# Allegro board pcbsonde.brd
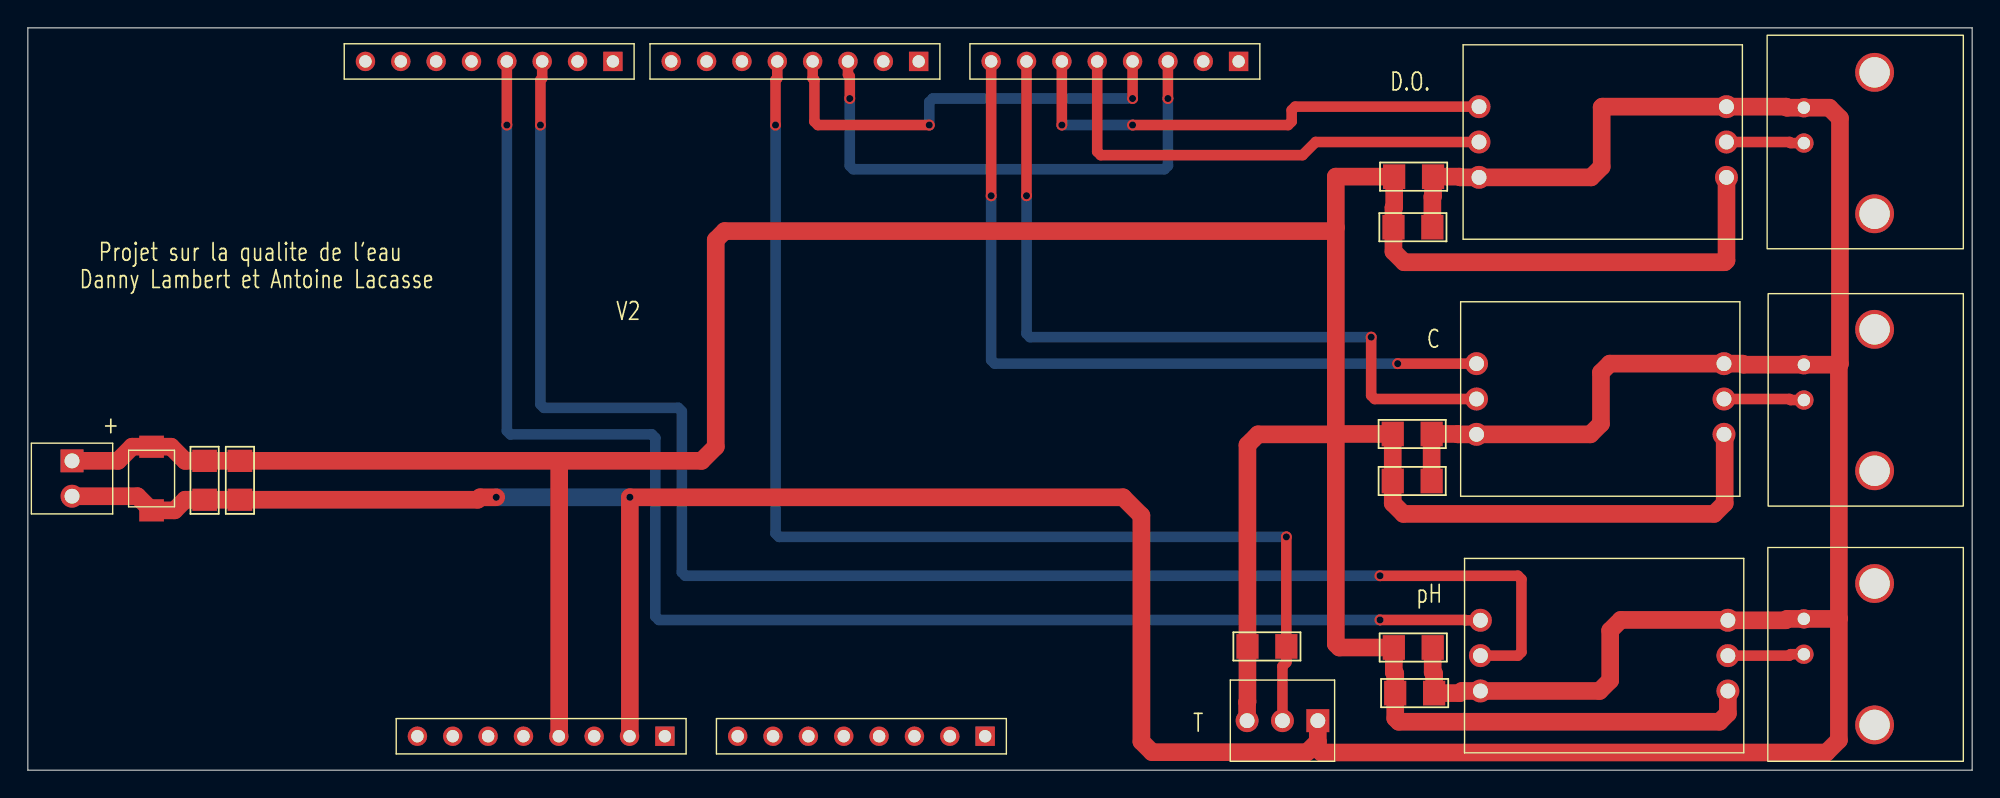
[diagram p0: board, top side]
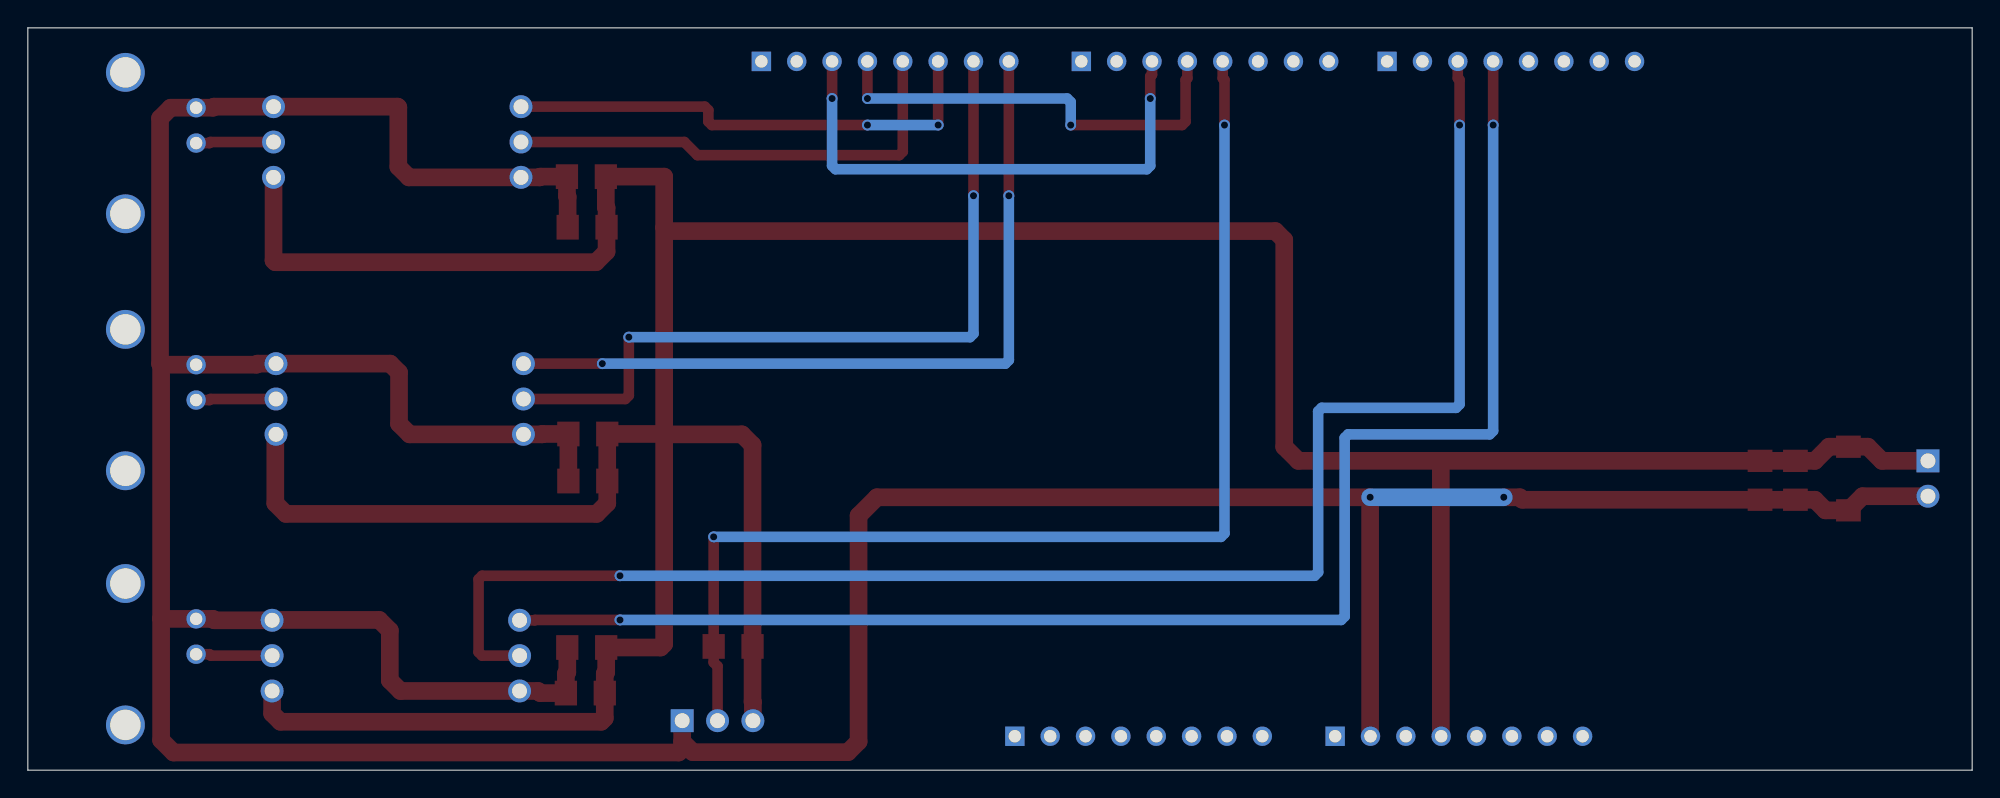
[diagram p1: board, bottom side, seen from below]

Outline 139.7 x 53.34 mm; copper layers: TOP, BOTTOM. Coordinates in mm from the lower left corner of the outline.

## Design rules (mm)
nets with their own width: min track width 0.254; nets N45692 N45704 N45776 N45784 N45788 N45808 N45820 N45850 N45858 N46174 N46194 N46206
nets with their own width: min track width 0.762; nets N45376 N45396

## Placement (name value [footprint] x y rotation side)
C7  100u  [C_1206]  12.7 22.23 270 top
C8  100u  [C_1206]  15.24 22.23 270 top
C101  100u  [C_1206]  98.07 24.16 0 top
C201  0.1u  [C_1206]  98.07 20.78 0 top
C302  100u  [C_1206]  98.17 42.65 0 top
C402  0.1u  [C_1206]  98.12 39.01 0 top
C503  100u  [C_1206]  98.15 8.81 0 top
C603  0.1u  [C_1206]  98.25 5.54 0 top
D1  1N5338  [ZENER_5V]  8.89 20.96 90 top
J1  H8  [STACKER_8]  78.1 50.93 270 top
J2  H8  [STACKER_8]  55.12 50.93 270 top
J3  H8  [STACKER_8]  33.15 50.93 270 top
J4  H8  [STACKER_8]  59.89 2.44 270 top
J5  H8  [STACKER_8]  36.88 2.44 270 top
JP1  Sonde T  [CONNECTEUR_3]  90.14 3.56 270 top
JP2  Alim.  [CONNECTEUR_2]  3.18 20.96 0 top
NOREF  -  []  0 0 0 top
R1  4.7K  [R_1206]  87.63 8.89 0 top
U1  Oxygene  [CONDITIONNEMENT]  113.16 45.14 0 top
U2  Conductivite  [CONDITIONNEMENT]  112.98 26.67 0 top
U3  pH  [CONDITIONNEMENT]  113.26 8.23 0 top
U4  Sonde pH  [BNC_CONNECTEUR]  125.07 15.95 270 top
U5  Sonde O  [BNC_CONNECTEUR]  125.07 52.68 270 top
U6  Sonde C  [BNC_CONNECTEUR]  125.07 34.21 270 top

## Library data of the parts
C7 C8 C101 C201 C302 C402 C503 C603 = C
D1 = 1N4099
J1 J2 J4 J5 = HEADER 10_0
J3 = HEADER 10_2
JP1 = HEADER 10_5
JP2 = HEADER 10_4
R1 = R
U1 = Oxygene
U2 = Conductivite
U3 = pH
U4 = Probe_3
U5 = Probe_2
U6 = Probe_1

## Footprints (pads in the part's own frame, mm; a bottom-side part is the same pattern mirrored in y, then rotated)
BNC_CONNECTEUR
  round 1.397 hole 0.889: 1(5.08,2.54) 2(7.62,2.54)
  round 2.794 hole 2.184: 3(2.54,7.62) 4(12.7,7.62)
C_1206
  rect 1.6x1.778 smd: 1(0,0) 2(2.794,0)
CONDITIONNEMENT
  round 1.651 hole 1.067: 1(-8.89,2.54) 2(-8.89,0) 3(-8.89,-2.54) 4(8.89,-2.54) 5(8.89,0) 6(8.89,2.54)
CONNECTEUR_2
  rect 1.651x1.651 hole 1.067: 1(0,1.27)
  round 1.651 hole 1.067: 2(0,-1.27)
CONNECTEUR_3
  rect 1.651x1.651 hole 1.067: 1(0,2.54)
  round 1.651 hole 1.067: 2(0,0) 3(0,-2.54)
R_1206
  rect 1.6x1.778 smd: 1(0,0) 2(2.794,0)
STACKER_8
  rect 1.397x1.397 hole 0.889: 1(0,8.89)
  round 1.397 hole 0.889: 2(0,6.35) 3(0,3.81) 4(0,1.27) 5(0,-1.27) 6(0,-3.81) 7(0,-6.35) 8(0,-8.89)
ZENER_5V
  rect 1.6x1.778 smd: 1(-2.286,0) 2(2.286,0)

## Nets
N45376: C7.2 C8.2 C101.2 C201.2 C302.2 C402.2 C503.2 C603.2 D1.1(A) J5.2 JP1.1 JP2.2(-) U1.3(GND#3) U1.6(GND#6) U2.3(GND#3) U2.6(GND#6) U3.3(GND#3) U3.6(GND#6) U4.1(GND) U5.1(GND) U6.1(GND)
N45396: C7.1 C8.1 C101.1 C201.1 C302.1 C402.1 C503.1 C603.1 D1.2(K) J5.4 JP1.3 JP2.1(+) R1.1 U1.4(VCC) U2.4(VCC) U3.4(VCC)
N45692: J1.6 U1.1(RX)
N45704: J1.5 U1.2(TX)
N45776: U3.5(PRB) U4.2(PRB)
N45784: U1.5(PRB) U5.2(PRB)
N45788: U2.5(PRB) U6.2(PRB)
N45808: J1.7 U2.2(TX)
N45820: J1.8 U2.1(RX)
N45850: J3.3 U3.2(TX)
N45858: J3.4 U3.1(RX)
N46174: J2.5 JP1.2 R1.2
N46194: J1.3 J2.3
N46206: J1.4 J2.4

Pads without a net: J1 1 2; J2 1 2 6 7 8; J3 1 2 5 6 7 8; J4 1 2 3 4 5 6 7 8; J5 1 3 5 6 7 8; U4 3 4; U5 3 4; U6 3 4

## Via types
v1: diameter 0.787, hole 0.508, TOP to BOTTOM, 18 vias

## Routing (per net, layer and track width the routed paths; a pad name or vN(x,y) marks a point on that pad's centre or on a via; arc(x,y) is an arc through that point)
N45376: length 321.1
  TOP w1.27: C503.2 100.94,7.04 101.04,6.93 C603.2 102.88,5.54 103.04,5.69 U3.3 112.93,5.69 113.69,6.45 113.69,10.03 114.45,10.79 122.12,10.79 U3.6 126.3,10.77 126.4,10.87 U4.1 130.1,10.87 130.12,10.9 ; 3.18,19.68 7.87,19.68 8.89,18.67 10.54,18.67 11.3,19.43 C7.2 C8.2 32.32,19.43 32.5,19.61 v1(33.66,19.61) ; 130.12,29.13 130.12,10.9 ; 130.12,29.13 U6.1 123.28,29.13 123.2,29.21 U2.6 113.66,29.21 113.03,28.57 113.03,24.89 112.27,24.13 U2.3 102.76,24.13 102.73,24.16 C101.2 C201.2 ; 130.12,29.13 130.2,29.21 130.2,46.84 129.44,47.6 U5.1 126.4,47.6 126.33,47.68 U1.6 113.13,47.68 113.08,47.62 113.08,43.36 112.32,42.6 U1.3 102.93,42.6 102.88,42.65 C302.2 100.97,41.25 100.91,41.2 C402.2 ; 130.12,10.9 130.12,2.16 129.24,1.27 92.94,1.27 92.68,1.52 92.68,2.06 ; 92.68,2.06 JP1.1 ; 92.68,2.06 91.92,1.3 80.77,1.3 80.01,2.06 80.01,18.29 78.69,19.61 v1(43.26,19.61) 43.26,2.41
  BOTTOM w1.27: v1(43.26,19.61) v1(33.66,19.61)
N45396: length 300.9
  TOP w1.27: U3.4 122.15,4.08 121.55,3.48 98.5,3.48 98.25,3.73 C603.1 98.25,6.93 98.15,7.04 C503.1 94.23,8.81 93.98,9.07 93.98,24.16 ; JP2.1 6.48,22.23 7.49,23.24 D1.2 10.29,23.24 11.3,22.23 C7.1 C8.1 38.1,22.23 ; U1.4 122.05,36.63 121.92,36.5 98.88,36.5 98.12,37.26 C402.1 98.12,40.41 98.17,40.46 C302.1 93.98,42.65 93.98,38.99 ; 93.98,38.99 93.73,38.73 50.06,38.73 49.43,38.1 49.43,23.24 48.41,22.23 38.1,22.23 ; 93.98,38.99 93.98,24.16 ; 93.98,24.16 93.95,24.13 88.39,24.13 87.63,23.37 R1.1 87.63,4.91 87.6,4.89 JP1.3 ; 93.98,24.16 C101.1 C201.1 98.07,19.18 98.83,18.41 121.16,18.41 121.92,19.18 121.92,24.08 U2.4 ; 38.18,2.41 38.18,22.15 38.1,22.23
N45692: length 35.6
  TOP w0.762: v1(74.29,46.35) J1.6 ; v1(79.38,46.35) 90.55,46.35 90.81,46.61 90.81,47.42 91.06,47.68 U1.1
  BOTTOM w0.762: v1(79.38,46.35) v1(74.29,46.35)
N45704: length 34.4
  TOP w0.762: J1.5 76.84,44.45 77.09,44.19 91.59,44.19 92.53,45.14 U1.2
N45776: length 5.5
  TOP w0.762: U3.5 126.56,8.23 126.66,8.33 U4.2
N45784: length 5.6
  TOP w0.762: U5.2 126.66,45.06 126.58,45.14 U1.5
N45788: length 5.8
  TOP w0.762: U6.2 126.66,26.59 126.58,26.67 U2.5
N45808: length 56.3
  TOP w0.762: v1(96.52,31.12) 96.52,26.92 96.77,26.67 U2.2 ; v1(71.75,41.27) J1.7
  BOTTOM w0.762: v1(71.75,41.27) 71.75,31.37 72.01,31.12 v1(96.52,31.12)
N45820: length 56.4
  TOP w0.762: U2.1 v1(98.43,29.21) ; v1(69.22,41.27) J1.8
  BOTTOM w0.762: v1(69.22,41.27) 69.22,29.46 69.47,29.21 v1(98.43,29.21)
N45850: length 115.4
  TOP w0.762: J3.3 36.96,49.72 36.83,49.59 v1(36.83,46.35) ; v1(97.16,13.97) 107.06,13.97 107.31,13.72 107.31,8.48 107.06,8.23 U3.2
  BOTTOM w0.762: v1(36.83,46.35) 36.83,26.29 37.08,26.04 46.74,26.04 46.99,25.78 46.99,14.22 47.24,13.97 v1(97.16,13.97)
N45858: length 109.6
  TOP w0.762: U3.1 103.29,10.77 103.26,10.79 v1(97.16,10.79) ; J3.4 v1(34.42,46.35)
  BOTTOM w0.762: v1(97.16,10.79) 45.34,10.79 45.09,11.05 45.09,23.88 44.83,24.13 34.67,24.13 34.42,24.38 v1(34.42,46.35)
N46174: length 84.1
  TOP w0.762: v1(53.72,46.35) 53.72,49.59 53.85,49.72 J2.5 ; JP1.2 90.14,7.47 90.42,7.75 R1.2 v1(90.42,16.76)
  BOTTOM w0.762: v1(53.72,46.35) 53.72,17.02 53.98,16.76 v1(90.42,16.76)
N46194: length 38.1
  TOP w0.762: J1.3 v1(81.91,48.26) ; J2.3 58.93,49.97 59.05,49.85 v1(59.05,48.26)
  BOTTOM w0.762: v1(81.91,48.26) 81.91,43.43 81.66,43.18 59.31,43.18 59.05,43.43 v1(59.05,48.26)
N46206: length 31.8
  TOP w0.762: J1.4 v1(79.38,48.26) ; v1(64.77,46.35) 56.77,46.35 56.51,46.61 56.51,49.59 56.39,49.72 J2.4
  BOTTOM w0.762: v1(79.38,48.26) 65.02,48.26 64.77,48.01 v1(64.77,46.35)

## Text on the board
Ref Des/Silkscreen Top: + | V2 | T | D.O. | pH | C
